# Altium PCB PCB_sensor_tape_v2.PcbDoc
Units mil, origin at the board's own origin, x right, y up, seen from the top; angles counter-clockwise.
Board outline 980 x 1215 mil, 2 copper layers (Top Layer, Bottom Layer); 29 components, 34 nets, 128 pads, 44 vias.
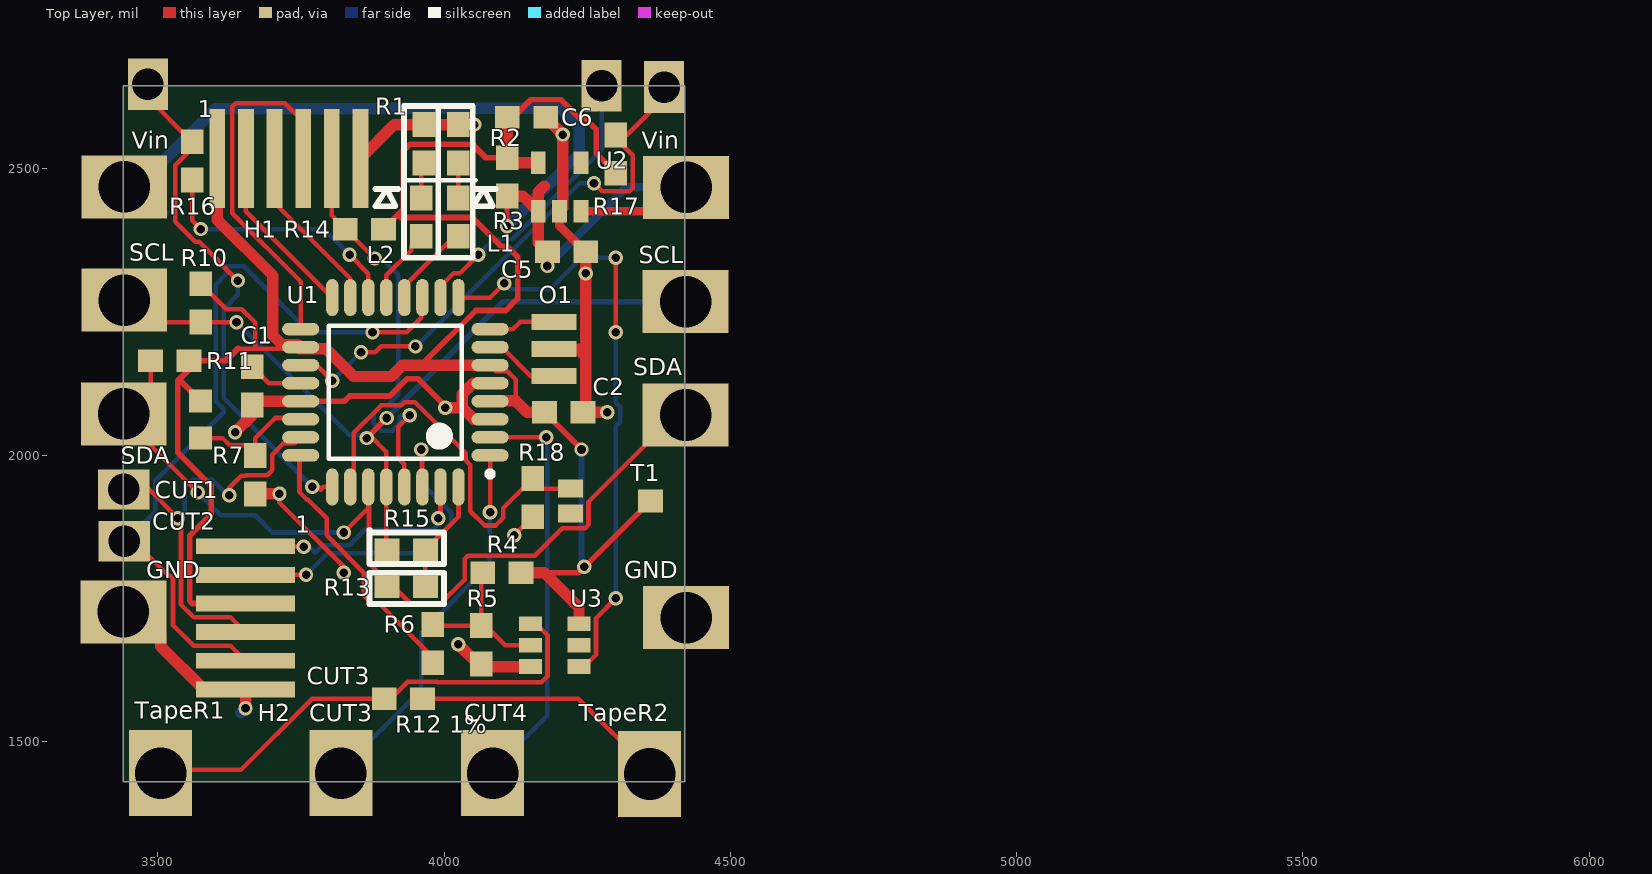
[diagram p0: Top Layer view]
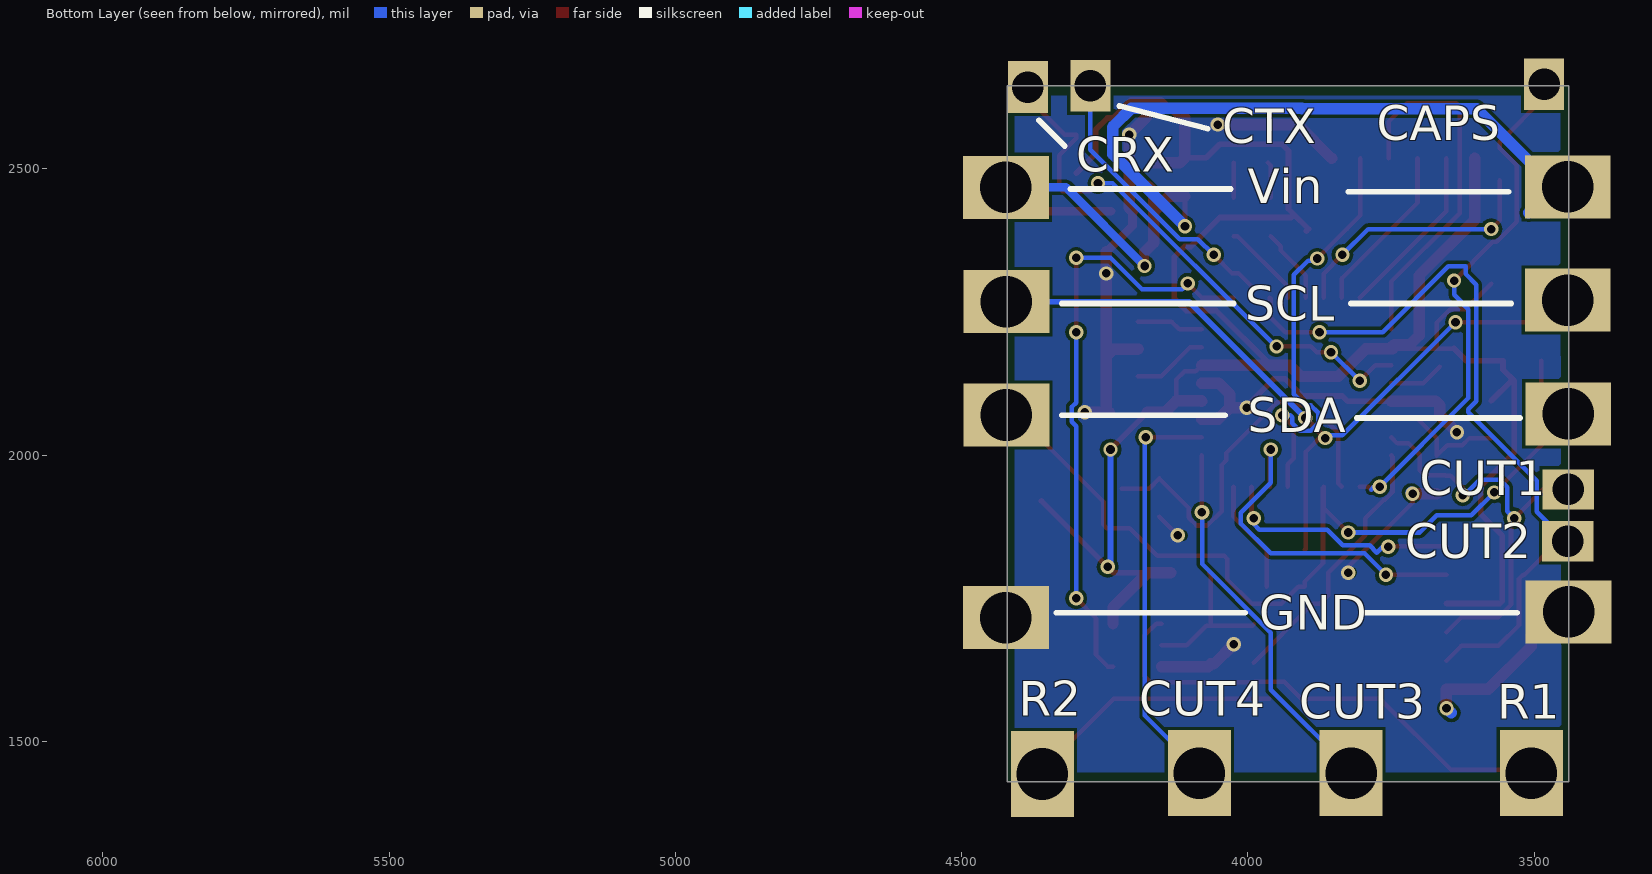
[diagram p1: Bottom Layer view, seen from below]

## Layer stack, top to bottom
Top Layer: signal copper 1.4
Dielectric: dielectric 12.6, FR-4, Dk 4.8
Bottom Layer: signal copper 1.4

## Board outline
3440,1430 3440,2645 4420,2645 4420,1430

## Design rules (kind name [scope] priority, off if disabled: settings)
Clearance Clearance_2 [OnLayer('Keep-Out Layer')] p1: gap=10
Clearance [All] p2: gap=6
PlaneConnect [All] p1: planeconnectstyle=Direct reliefexpansion=20 reliefentries=4 reliefconductorwidth=10 reliefairgap=10
PolygonConnect [All] p1: connectstyle=Direct reliefconductorwidth=10 reliefentries=4 polygonreliefangle="90 Angle" airgapwidth=10
RoutingVias [All] p1: holewidth=15 width=25 viastyle="Through Hole" minholewidth=15 minwidth=25 maxholewidth=28 maxwidth=50
SolderMaskExpansion [All] p1: expansion=4
Width [All] p1: maxlimit=30 minlimit=5 preferedwidth=8
27 further rules are at their usual default settings.

## Components (designator, comment, footprint, x,y, rotation, side; value= is the part's Value field where it differs from the comment)
C1 "0.1uF" 0603W 3665,2120 r90 top
C2 "0.1uF" 0603W 4210,2075 r180 top
C5 "10uF" 0603W 4215,2355 r180 top
C6 "10uF" 0603W 4145,2590 r180 top
H1 "6 pin smd 1.27mm female" "1.27mm smd female" 3615,2515 r0 top
H2 "6 pin smd 1.27mm female" "1.27mm smd female" 3650,1830 r270 top
L1 "BLUE" 0603W 4025,2415 r90 top
L2 "RED" 0603W 3960,2415 r90 top
O1 "Resonator SMD" "Resonator SMD" 4190,2155 r180 top
R1 "330" 0603W 3965,2545 r270 top
R2 "330" 0603W 4025,2545 r270 top
R3 "Zero" 0603W 4110,2485 r90 top
R4 "10K 1%" 0603W 4100,1795 r0 top
R5 "Zero" 0603W 4065,1670 r270 top
R6 "Zero" 0603W 3980,1670 r90 top
R7 "10K" 0603W 3670,1965 r90 top
R10 "10K" 0603W 3575,2265 r90 top
R11 "10K" 0603W 3520,2165 r0 top
"R12 1%" "1K" 0603W 3930,1575 r180 top
R13 "ZERO" 0603W 3935,1770 r180 top
R14 "10K" 0603W 3860,2395 r0 top
R15 "ZERO" 0603W 3935,1835 r180 top
R16 "100K" 0603W 3560,2515 r270 top
R17 "DNP" 0603W 4300,2525 r90 top
R18 "10K" 0603W 4155,1925 r90 top
T1 "TEMPT6000" TEMP6000 4260,1925 r0 top
U1 "ATmega328P-AU" 32A_N 3915,2110 r180 top
U2 "MIC5205_VOLTAGE_REG" SOT-23-5 4180,2490 r0 top
U3 "ADG702L" RT-6 4215,1690 r270 top

## Footprints (in the part's own frame and the unit in brackets; to place one, negate y for a bottom-side part, rotate by r counter-clockwise, add the part's x,y. Pads: shape width x height; smd on the part's side, far side on the other; paste and mask are expansions set on the pad)
"1.27mm smd female" [mm] "female connector smd for 1,27mm"
  rect 0.7x4.4 smd: 1(-0.279,0.083) 2(0.99,0.084) 3(2.259,0.084) 4(3.529,0.084) 5(4.798,0.084) 6(6.068,0.085)
32A_N [mm] "Thin QFP, 32-Leads, Body 7x7mm, Pitch 0.8mm, IPC Medium Density"
  oval 1.65x0.55 smd: 1(-4.2,2.8) 2(-4.2,2) 3(-4.2,1.2) 4(-4.2,0.4) 5(-4.2,-0.4) 6(-4.2,-1.2) 7(-4.2,-2) 8(-4.2,-2.8) 17(4.2,-2.8) 18(4.2,-2) 19(4.2,-1.2) 20(4.2,-0.4) 21(4.2,0.4) 22(4.2,1.2) 23(4.2,2) 24(4.2,2.8)
  oval 0.55x1.65 smd: 9(-2.8,-4.2) 10(-2,-4.2) 11(-1.2,-4.2) 12(-0.4,-4.2) 13(0.4,-4.2) 14(1.2,-4.2) 15(2,-4.2) 16(2.8,-4.2) 25(2.8,4.2) 26(2,4.2) 27(1.2,4.2) 28(0.4,4.2) 29(-0.4,4.2) 30(-1.2,4.2) 31(-2,4.2) 32(-2.8,4.2)
  silkscreen extent -4.33,-2.95 2.95,3.75, body extent -3.5,-3.5 3.5,3.5, height 1.2
0603W [mm]
  rect 1.1x1 smd: 1(-0.825,0) 2(0.875,0)
  body extent -0.77,-0.4 0.83,0.4, height 0.8
"Resonator SMD" [mm]
  rect 2x0.7 smd: 1(-0.05,-1.975) 2(-0.05,-0.775) 3(-0.05,0.425)
  body extent -0.77,-2.35 0.8,0.8, height 1.15
RT-6 [mm] "Same as SOT-23 but with  6 pins"
  rect 0.65x1 smd: 1(-0.4,-1.625) 2(0.55,-1.625) 3(1.5,-1.625) 4(1.5,0.525) 5(0.55,0.525) 6(-0.4,0.525)
  body extent -0.77,-1.68 1.88,0.58, height 1.1
SOT-23-5 [mm]
  rect 0.65x1 smd: 1(-0.4,-1.625) 2(0.55,-1.625) 3(1.5,-1.625) 4(1.5,0.525) 5(-0.4,0.525)
  body extent -0.77,-1.68 1.88,0.58, height 1.1
TEMP6000 [mm] "Ambient Light sensor"
  rect 1.1x1 smd: 1(2.55,-0.125)
  rect 1.1x0.8 smd: 2(-1,0.425) 3(-1,-0.675)
  body extent -1.28,-1.13 2.73,0.87, height 1.05

## Part data
C1 C2 C5 C6: library part Capacitor, "SMD Cap 1206"
L1 L2: library part LED, "LED SMD 1206/0603"
O1: "Build in caps"
R1 R2 R3 R4 R5 R6 R7 R10 R11 "R12 1%" R13 R14 R15 R16 R17 R18: library part Resistor
U1: "8-bit AVR Microcontroller, 32KB Flash, 1KB EEPROM, 2KB SRAM, 32-pin TQFP, Industrial Grade (-40°C to 85°C)"
U2: "5V LDO SMD"

## Free pads (board coordinates)
  rect 150x110 hole 90: 0(3439.96,1726.38) 0(3440.57,2072.21) 0(3441.56,2271.03) 0(3441.56,2468.87) 0(4421.87,2070.25) 0(4421.87,2268.08) 0(4422.86,1716.29) 0(4422.86,2467.88)
  rect 110x150 hole 90: 0(3505,1445) 0(3820,1445) 0(4085,1445) 0(4358.88,1443.28)
  rect 19.68x118.11 on Mech15 paste+0 mask+0: 0(3770.13,1555.48) 0(5227.97,1657.84) 0(5775.22,1780.88) 0(5979.94,1613.55)
  rect 90x70 hole 55: 1(3440.57,1940.32) 1(3441.56,1849.77)
  rect 70x90 hole 55: 1(3482.9,2648) 1(4275.22,2645.05) 1(4384.47,2643.08)
  rect 40x40 smd: 1(3575,2030) 1(3575,2095)

## Via types
v1: diameter 25, hole 15, Top Layer to Bottom Layer, tented both sides, 43 vias
v2: diameter 26, hole 15, Top Layer to Bottom Layer, tented both sides, 1 vias

## Nets (pads, with @x,y where several pads share a name; then routed paths per layer and width w, separated by ;. In a path a pad name is that pad's centre, name@x,y a point inside that pad or via, vN(x,y) a via of type N, cw(c..) or ccw(c..) an arc to the next point about the centre after c; other vN are vias at no path point)
CAPBENDRECEIVE: pad.1@4384.47,2643.08 R17.2 U1.19 | length 966.9
  Top Layer w8: U1.19 3777.76,2157.24 v1(3805,2130) ; v1(3855,2180) 3880,2180 3890,2190 v1(3950,2190) ; v1(4261.81,2474.79) 4262.25,2474.79 4263.52,2473.52 4276.17,2460.87 4323.83,2460.87 4329.69,2466.72 4329.69,2524.17 4300,2553.86 R17.2 4319.84,2559.45 4384.47,2624.08 pad.1@4384.47,2623.92
  Bottom Layer w8: v1(3805,2130) v1(3855,2180) ; v1(3950,2190) 3951.62,2190 4236.62,2475 4255,2475 4260,2470 4263.66,2473.66 4263.66,2474.25 4263.13,2474.79 v1(4261.81,2474.79)
CAPBENDTRANSMIT: pad.1@4275.22,2645.05 U1.10 | length 490.5
  Top Layer w8: U1.10 3993.74,2294.97 4016.61,2317.83 4027.83,2317.83 v1(4060,2350)
  Bottom Layer w8: v1(4060,2350) 4087.5,2377.5 4119.32,2377.5 4275.22,2533.4 pad.1@4275.22,2624.08
CAPSEND: R16.2 U1.14 | length 458.6
  Top Layer w8: R16.2 3560,2410 v1(3575,2395) ; v1(3835,2350) 3867.76,2317.24 U1.14
  Bottom Layer w8: v1(3575,2395) 3790,2395 v1(3835,2350)
CAPSENSE: pad.1@3482.9,2648 R16.1 U1.25 | length 910.5
  Top Layer w8: pad.1@3482.9,2624.08 3559.5,2547.48 R16.1 3560,2536.03 3530.31,2506.35 3530.31,2407.87 3565.68,2372.5 3572.5,2372.5 v1(3640,2305) ; v1(3770,1945) 3780,1945 3785,1940 3789.65,1944.65 U1.25
  Bottom Layer w8: v1(3640,2305) 3640,2280.04 3614.98,2255.02 3614.98,2100.02 v1@3775,1940 ; v1(3770,1945) 3780,1945 3785,1940
CUT1: H2.4 pad.1@3440.57,1940.32 U1.23 | length 727
  Top Layer w8: pad.1@3458.6,1940.32 3484.68,1940.32 v1(3535,1890) 3540.67,1884.33 3540.67,1739.15 3562.55,1717.26 3627.1,1717.26 H2.4 ; v1(3625,1930) 3625,1943 3646.17,1964.17 3654.17,1964.17 3655,1965 3691.03,1965 3699.69,1973.65 3699.69,2000.91 3719.37,2020.59 3738.98,2020.59 U1.23
  Bottom Layer w8: v1(3535,1890) 3547.5,1902.5 3547.5,1944.32 3560.68,1957.5 3595,1957.5 3622.5,1930 v1(3625,1930)
CUT2: H2.5 pad.1@3441.56,1849.77 U1.11 | length 1344.5
  Top Layer w8: pad.1@3458.6,1849.77 3516.99,1791.38 3519.1,1791.38 3526.67,1783.81 3526.67,1703.16 3562.55,1667.28 3627.14,1667.28 H2.5 ; v1(3875,2215) 3935,2215 3960,2240 3960,2273.11 U1.11 U1.11@3962.24,2252.24
  Bottom Layer w8: pad.1@3458.6,1849.77 3458.6,1864.21 3495.57,1901.18 3495.57,1955.57 3614.98,2074.98 3614.98,2080.22 3600.98,2094.22 3600.98,2297.8 3620,2316.82 3620,2330 3649.9,2330 3764.9,2215 v1(3875,2215)
CUT3: pad.0@3820,1445 U1.1 | length 657.1
  Top Layer w8: v2(4080.35,1900.35) U1.1
  Bottom Layer w8: pad.0@3820,1450.47 3960,1590.47 3960,1690 4080,1810 4080,1900 v2(4080.35,1900.35)
CUT4: pad.0@4085,1445 U1.2 | length 719.1
  Top Layer w8: U1.2 v1(4178.74,2031.26)
  Bottom Layer w8: pad.0@4085,1450.47 4180,1545.47 4180,2030 v1(4178.74,2031.26)
GND: C1.1 C2.1 C5.1 C6.1 H1.6 H2.6 O1.2 pad.0@3439.96,1726.38 pad.0@4422.86,1716.29 R1.1 R2.1 R5.2 R7.1 R18.1 U1.3 U1.5 U1.21 U2.2 U3.3 | length 2243.5
  Top Layer w8: v1(3712.52,1932.52) 3712.52,1917.48 3830,1800 v1(3825,1795) ; v1(4122.48,1860) R18.1
  Top Layer w10: U1.21 3826.02,2094.25 3835.27,2103.5 3905.27,2103.5 3935.27,2133.5 3954.73,2133.5 4001.87,2086.36 v1(4001.87,2083.13)
  Top Layer w15: U2.2 4201.65,2400.83 C5.1
  Top Layer w20: pad.0@3464.6,1726.38 3505,1685.97 3505,1666.4 3580.29,1591.11 H2.6 v1(3653.34,1558.34) ; v1(3635,2040) 3665,2070 C1.1 3671.73,2094.25 U1.21 ; R7.1 v1(3712.52,1932.52) ; H1.6 3913.04,2577.48 R1.1 R2.1 v1(4052.48,2577.48) ; v1(4001.87,2083.13) 4031.87,2083.13 ; v1(4025,1670) 4059.45,1635.55 R5.2 4069.61,1630.94 U3.3 ; U1.3 4052.24,2062.76 4031.87,2083.13 ; U1.5 4050.75,2125.75 4031.87,2106.87 4031.87,2083.13 ; C6.1 v1(4207.48,2560) 4207.48,2431.85 U2.2 ; O1.2 4192.48,2185 4235,2185 4247.34,2172.66 ; C5.1 v1(4247.48,2317.52) 4247.48,2172.8 4247.34,2172.66 ; v1(4285,2075) C2.1 4247.34,2079.86 4247.34,2172.66 ; pad.0@4397.86,1702.86 pad.0@4397.86,1716.29 ; pad.0@4411.29,1716.29 pad.0@4422.86,1716.29
  Bottom Layer w8: v1@3820,1795 v1(3825,1795) ; v1@4115,1860 v1(4122.48,1860)
  Bottom Layer w20: v1@3645,1550 v1(3653.34,1558.34) ; v1(3712.52,1932.52) v1@3715,1935
INT0: R13.1 R15.1 U1.32 | length 198.6
  Top Layer w8: R13.1 R15.1 4025.24,1892.76 U1.32
LED1: L1.1 U1.12 | length 150.1
  Top Layer w8: U1.12 3930.75,2294.97 4018.3,2382.52 L1.1
LED2: L2.1 U1.13 | length 132.3
  Top Layer w8: U1.13 3899.25,2314.25 3942.52,2357.52 3942.52,2365.04 L2.1
LIGHTSENSE: R18.2 T1.2 U1.26 | length 692.7
  Top Layer w8: U1.26 3842.5,1950.89 3842.5,2039.32 3890.68,2087.5 3925.68,2087.5 3930.68,2092.5 3949.32,2092.5 4037.87,2003.95 4037.87,1991.14 4046.06,1982.95 4046.06,1902.12 4070.83,1877.35 4089.88,1877.35 4103.35,1890.83 4103.35,1907.8 R18.2 4172.72,1941.73 T1.2
MISO: H1.2 U1.16 | length 305.4
  Top Layer w8: H1.2 3654,2426.12 U1.16
MOSI: H1.3 U1.15 | length 297.8
  Top Layer w8: H1.3 3703.96,2441.04 3836.26,2308.74 U1.15
NetC1_2: C1.2 U1.20 | length 96.5
  Top Layer w8: C1.2 3693.7,2125.75 U1.20
NetL1_2: L1.2 R2.2 | length 61.1
  Top Layer w8: L1.2 R2.2
NetL2_2: L2.2 R1.2 | length 63.2
  Top Layer w8: L2.2 3960,2505.55 R1.2
NetO1_1: O1.1 U1.8 | length 116.8
  Top Layer w8: U1.8 4120.24,2220.24 4132.76,2232.76 O1.1
NetO1_3: O1.3 U1.7 | length 132.5
  Top Layer w8: U1.7 4101.26,2188.74 4151.73,2138.27 O1.3
NetR4_1: R4.1 R5.1 R6.2 U3.2 | length 269.5
  Top Layer w8: R6.2@3990,1704.45 3991.97,1702.48 R5.1 ; R4.1 4065,1792.48 R5.1 ; U3.2 4106.65,1668.35 4072.52,1702.48 R5.1
RESET: H1.5 R14.1 U1.29 | length 765.5
  Top Layer w8: H1.5 3803.9,2418.62 R14.1 v1(3879.01,2343.51) ; U1.29 3930.75,1984.25 3920,1995 3920,2050 v1(3940,2070)
  Bottom Layer w8: v1(3879.01,2343.51) 3882.52,2340 3895,2340 3920,2315 3920,2106.21 3901.29,2087.5 3890.68,2087.5 3877.5,2074.32 3877.5,2055.68 3890.68,2042.5 3909.32,2042.5 3922.5,2055.68 3922.5,2066.29 3926.21,2070 v1(3940,2070)
RESISTANCESENSE: R6.1 U1.24 | length 471.9
  Top Layer w8: U1.24 3747.5,1997.62 3747.5,1935.68 3760.68,1922.5 3762.5,1922.5 3795,1890 3795,1860 3860,1795 3860,1755.07 3874.76,1740.31 3887.2,1740.31 R6.1@3990,1637.52
RESISTANCESENSEENABLE: U1.9 U3.4 | length 1064.2
  Top Layer w8: U1.9 4080.35,2275.35 v1(4105,2300) ; U3.4 4244.89,1630.94 4265.35,1651.41 4265.35,1715.35 v1(4300,1750) ; v1(4300,2215) v1(4300,2345)
  Bottom Layer w8: v1(4105,2300) 4115,2290 4185,2290 4240,2345 v1(4300,2345) ; v1(4300,1750) 4300,2050.68 4307.5,2058.18 4307.5,2084.32 4300,2091.82 v1(4300,2215)
RX: H2.2 U1.30 | length 613.7
  Top Layer w8: H2.2 v1(3759,1791) ; v1(3960,2010) 3962.24,2007.76 U1.30
  Bottom Layer w8: v1(3759,1791) 3796.49,1828.5 3960.32,1828.5 4012.5,1880.68 4012.5,1899.32 3960,1951.82 v1(3960,2010)
SCK: H1.4 U1.17 | length 642.3
  Top Layer w8: U1.17 3749.65,2303.32 3630.22,2422.74 3630.22,2609.05 3636.09,2614.92 3721.88,2614.92 3753.94,2582.86 H1.4
SCL: pad.0@3441.56,2271.03 pad.0@4421.87,2268.08 R10.1 R15.2 U1.28 | length 1365.4
  Top Layer w8: pad.0@3458.6,2271.03 3497.11,2232.52 R10.1 v1(3637.48,2232.52) ; v1(3865,2030) 3870,2035 3899.25,2005.75 U1.28 3899.25,1836.3 R15.2
  Top Layer w10: v1@3870,2035 v1(3900,2065)
  Bottom Layer w8: v1(3637.48,2232.52) 3835,2035 3870,2035 v1(3865,2030)
  Bottom Layer w10: v1(3900,2065) 4103.08,2268.08 pad.0@4402.86,2268.08
SDA: pad.0@3440.57,2072.21 pad.0@4421.87,2070.25 R11.1 R13.2 U1.27 | length 1554.5
  Top Layer w8: R11.1 3487.52,2101.14 3458.6,2072.21 3458.6,2046.4 v1(3570,1935) ; v1(3825,1865) 3867.76,1907.76 U1.27 3868.9,1943.5 3868.9,1811.17 3900.55,1779.52 R13.2 3912,1770 3941.68,1740.31 3993.28,1740.31 4035.87,1782.9 4035.87,1818.83 4041.72,1824.69 4158.3,1824.69 4206.29,1872.68 4246.43,1872.68 4252.28,1878.54 4252.28,1918.67 pad.0@4403.86,2070.25
  Bottom Layer w8: v1(3570,1935) 3610,1895 3670,1895 3700,1865 v1(3825,1865)
TAPER1: "R12 1%.2" pad.0@3505,1445 U3.1 | length 853.5
  Top Layer w8: pad.0@3505,1450.47 3645.47,1450.47 3770,1575 3895.55,1575 3907,1575 3936.68,1604.69 3988.28,1604.69 3989.06,1603.9 4170.6,1603.9 4180.71,1614.01 4180.71,1685.28 4160.24,1705.75 U3.1
TAPER2: "R12 1%.1" pad.0@4358.88,1443.28 | length 448
  Top Layer w8: 3962.48,1575 4234.35,1575 pad.0@4358.88,1450.47
THERMISTORSENSE: pad.1@3575,2030 R7.2 U1.22 | length 233.3
  Top Layer w8: pad.1@3575,2030 3613.18,2030 3625.68,2017.5 3651.95,2017.5 R7.2 3670,2030 3705,2065 3747.4,2065 U1.22
TX: H2.1 U1.31 | length 454.5
  Top Layer w8: H2.1 3764.02,1840.98 3763.04,1840 v1(3755,1840) ; v1(3990,1890) 3993.74,1886.26 U1.31
  Bottom Layer w8: v1(3755,1840) 3763.04,1840 3764.02,1840.98 3775,1830 3787.5,1842.5 3834.32,1842.5 3861.82,1870 3980,1870 3990,1880 v1(3990,1890)
VCC: C2.2 C6.2 H1.1 H2.3 pad.1@3575,2095 R3.2 R4.2 R10.2 R11.2 R14.2 R17.1 T1.1 U1.4 U1.6 U1.18 U2.5 U3.6 | length 3934.5
  Top Layer w8: R10.2 3619.43,2255.02 3646.8,2255.02 3670,2231.82 3670,2186.1 ; 3641.17,2186.1 3670,2186.1 ; U1.18@3747.01,2186.1 3670,2186.1 ; U1.6 4091.02,2146.57 4110.63,2146.57 4125,2132.21 4125,2095
  Top Layer w10: pad.1@3575,2095 3540,2130 3535,2130 ; 3640.47,2186.81 3618.66,2165 R11.2 3554.45,2149.45 3535,2130 ; H2.3 3560.3,1741.04 3555.67,1745.67 3555.67,1859.32 3593.5,1897.15 3593.5,1946.5 3535,2005 3535,2130 ; R14.2@3897.65,2391.8 R14.2 3919.45,2420 ; 3960,2157.24 4055.69,2252.93 4107.93,2252.93 4128.5,2273.5 4128.5,2346.5 4110.59,2364.41 4100,2364.41 4049.24,2415.17 3924.28,2415.17 3919.45,2420 ; R3.2 4073,2519.45 4049.24,2543.2 3940.76,2543.2 3929.31,2531.76 3929.31,2429.87 3919.45,2420 ; C6.2@4110,2589.45 4120.03,2589.45 4151.27,2620.69 4204.03,2620.69 4235.66,2589.05 4245.48,2589.05 4265.83,2568.7 4265.83,2526.69 R17.1 ; 4175,1795 4235,1795 v1(4245,1805) 4245.31,1805 T1.1 ; C2.2 4240,2010.55 v1(4240,2010)
  Top Layer w20: H1.1 3604.02,2410.98 3701.17,2313.83 3701.17,2209.12 3716.88,2193.41 3744.98,2193.41 U1.18 ; U1.18@3747.01,2186.1 3793.9,2186.1 3842.5,2137.5 3907.6,2137.5 3927.35,2157.24 3960,2157.24 U1.6 ; U1.4 4081.1,2095 4125,2095 4145,2075 C2.2 ; C6.2@4110,2589.45 R3.2 4118.78,2510.67 U2.5 ; R4.2 4175,1795 4235.67,1734.33 U3.6
  Bottom Layer w10: v1(4240,2010) 4240,1810 v1(4245,1805)
VIN: C5.2 pad.0@3441.56,2468.87 pad.0@4422.86,2467.88 R3.1 U2.1 U2.3 | length 1859
  Top Layer w8: v1(4110,2400) R3.1
  Top Layer w15: v1(4180.55,2330.55) C5.2 ; U2.3 4358.5,2426.02 pad.0@4400.36,2467.88
  Top Layer w20: R3.1 4137.76,2452.52 U2.1 ; 4175,2470 4164.25,2459.25 U2.1 ; C5.2 4164.25,2371.3 U2.1
  Bottom Layer w10: pad.0@3459.6,2468.87 pad.0@3462.1,2466.37
  Bottom Layer w15: v1(4180.55,2330.55) 4317.88,2467.88 pad.0@4400.36,2467.88
  Bottom Layer w20: pad.0@3509.97,2423.5 3464.6,2468.87 3600.73,2605 3905,2605 3905.98,2605.98 4204.02,2605.98 4235,2575 4235,2573.77 4235.98,2572.79 4235.98,2525.98 v1(4110,2400)
pads on no net: T1.3 U2.4 U3.5

## Polygon pours and split planes (outlines as drawn)
GND on Bottom Layer "gnd pour" (solid, pour order 3): 3440,1430 3440,2645 4420,2645 4420,1430

## Silkscreen, mask and mechanical layers (free items; w line width, h text height)
Top Overlay:
  lines w8: 3930,2480 3985,2480 ; 3995,2480 4055,2480
  lines w10: 3870,1865 4000,1865 4000,1810 3870,1810 3870,1870 ; 3880,2465 3920,2465 ; 3990,2610 3990,2485 3990,2345 ; 4050,2465 4090,2465 ; 3990,2345 3930,2345 3930,2480 3930,2610 3995,2610 4050,2610 4050,2480 4050,2345 3990,2345 ; 3870,1740 4000,1740 4000,1795 3870,1795 3870,1740 ; 3880,2435 3915,2435 3900,2465 3880,2435 ; 4050,2435 4085,2435 4070,2465 4050,2435
  text "1" at 3570,2590 h30
  text "Vin" at 3455,2535 h30
  text "Vin" at 4345,2535 h30
  text "SCL" at 3450,2340 h30
  text "SCL" at 4340,2335 h30
  text "SDA" at 4330,2140 h30
  text "SDA" at 3435,1985 h30
  text "CUT1" at 3495,1925 h30
  text "CUT2" at 3490,1870 h30
  text "1" at 3740,1865 h30
  text "GND" at 3480,1785 h30
  text "GND" at 4315,1785 h30
  text "CUT3" at 3760,1600 h30
  text "TapeR1" at 3460,1540 h30
  text "CUT3" at 3765,1535 h30
  text "CUT4" at 4035,1535 h30
  text "TapeR2" at 4235,1535 h30
Bottom Overlay:
  lines w10: 3525,2065 3810,2065 ; 3530,1725 3800,1725 ; 3540,2265 3820,2265 ; 3545,2460 3825,2460 ; 4005,1725 4335,1725 ; 4025,2265 4325,2265 ; 4030,2465 4310,2465 ; 4040,2070 4325,2070 ; 4070,2570 4225,2610 ; 4320,2540 4365,2585
  text "CAPS" at 3775,2550 h60
  text "CTX" at 4045,2545 h60
  text "CRX" at 4300,2495 h60
  text "Vin" at 4000,2440 h60
  text "SCL" at 4005,2235 h60
  text "SDA" at 4000,2040 h60
  text "CUT1" at 3700,1930 h60
  text "CUT2" at 3725,1820 h60
  text "GND" at 3980,1695 h60
  text "CUT4" at 4190,1545 h60
  text "R2" at 4400,1545 h60
  text "R1" at 3565,1540 h60
  text "CUT3" at 3910,1540 h60
Mechanical 1:
  lines w10: 3437.62,1431.47 4422.86,1431.47 4422.86,2643.08 3439.59,2643.08 3437.62,1431.47
Mechanical 15:
  region: 4431.72,1844.85 4431.72,1951.15 4421.87,1951.15 4421.87,1844.85
  region: 6320.12,1813.36 6320.12,1886.19 6161.05,1886.19 6161.05,1813.36
  rectangle: 5765.38,1822.21 6167.94,1841.9
  region: 6320.12,1903.91 6320.12,1976.74 6161.05,1976.74 6161.05,1903.91
  rectangle: 4661.05,1921.62 6165.21,1941.31
  region: 4680.73,1721.82 4680.73,1937.37 4661.05,1937.37 4661.05,1721.82
  rectangle: 5599.83,1638.32 6185.65,1795.8
  rectangle: 5595.1,1991.51 6185.65,2148.99
  rectangle: 5594.12,2187.37 6185.65,2344.85
  rectangle: 5589.2,2383.24 6185.65,2540.72
  rectangle: 4470.1,2383.24 5589.2,2540.72
  rectangle: 4475.02,2187.37 5594.12,2344.85
  rectangle: 4476.01,1991.51 5595.1,2148.99
  rectangle: 4480.73,1638.32 5599.83,1795.8
  rectangle: 4407.11,1459.88 6277.19,1529.77
  rectangle: 4124.63,1554.5 5989.79,1574.18
  rectangle: 3760.45,1597.81 5234.86,1617.49
  rectangle: 4348.05,2587.96 4420.89,2715.92
  rectangle: 4238.8,2588.95 4311.64,2715.92
  rectangle: 3446.48,2588.95 3519.31,2735.6
  region: 4191.56,2665.72 3603.96,2665.72 3603.96,2655.88 4191.56,2655.88
  rectangle: 3559.67,2737.57 4303.76,2940.32
  rectangle: 3357.7,1991.66 4476.79,2149.14
  rectangle: 3356.72,2187.53 4475.81,2345.01
  rectangle: 3351.79,2383.39 4470.89,2540.88
  rectangle: 4298.84,1283.88 4416.95,1533.83
  rectangle: 4024.23,1324.24 4142.35,1574.18
  rectangle: 3760.46,1317.92 3878.57,1525.6
  rectangle: 3445.49,1319.26 3563.6,1526.94
  rectangle: 3361.64,1638.32 4480.73,1795.8
  rectangle: 4813.36,2619.09 5306.1,2786.42
  rectangle: 5375.98,2619.09 5868.72,2786.42
  lines w10: 3513.72,2628.32 3565.57,2628.32 3565.57,2761.19 3678.76,2761.19 ; 4330.34,2564.34 4607.9,2564.34 ; 4384.47,2643.08 4899.61,2643.08